# EAGLE board NeoDigito Medio v2_0 (EAGLE 9.1.3)
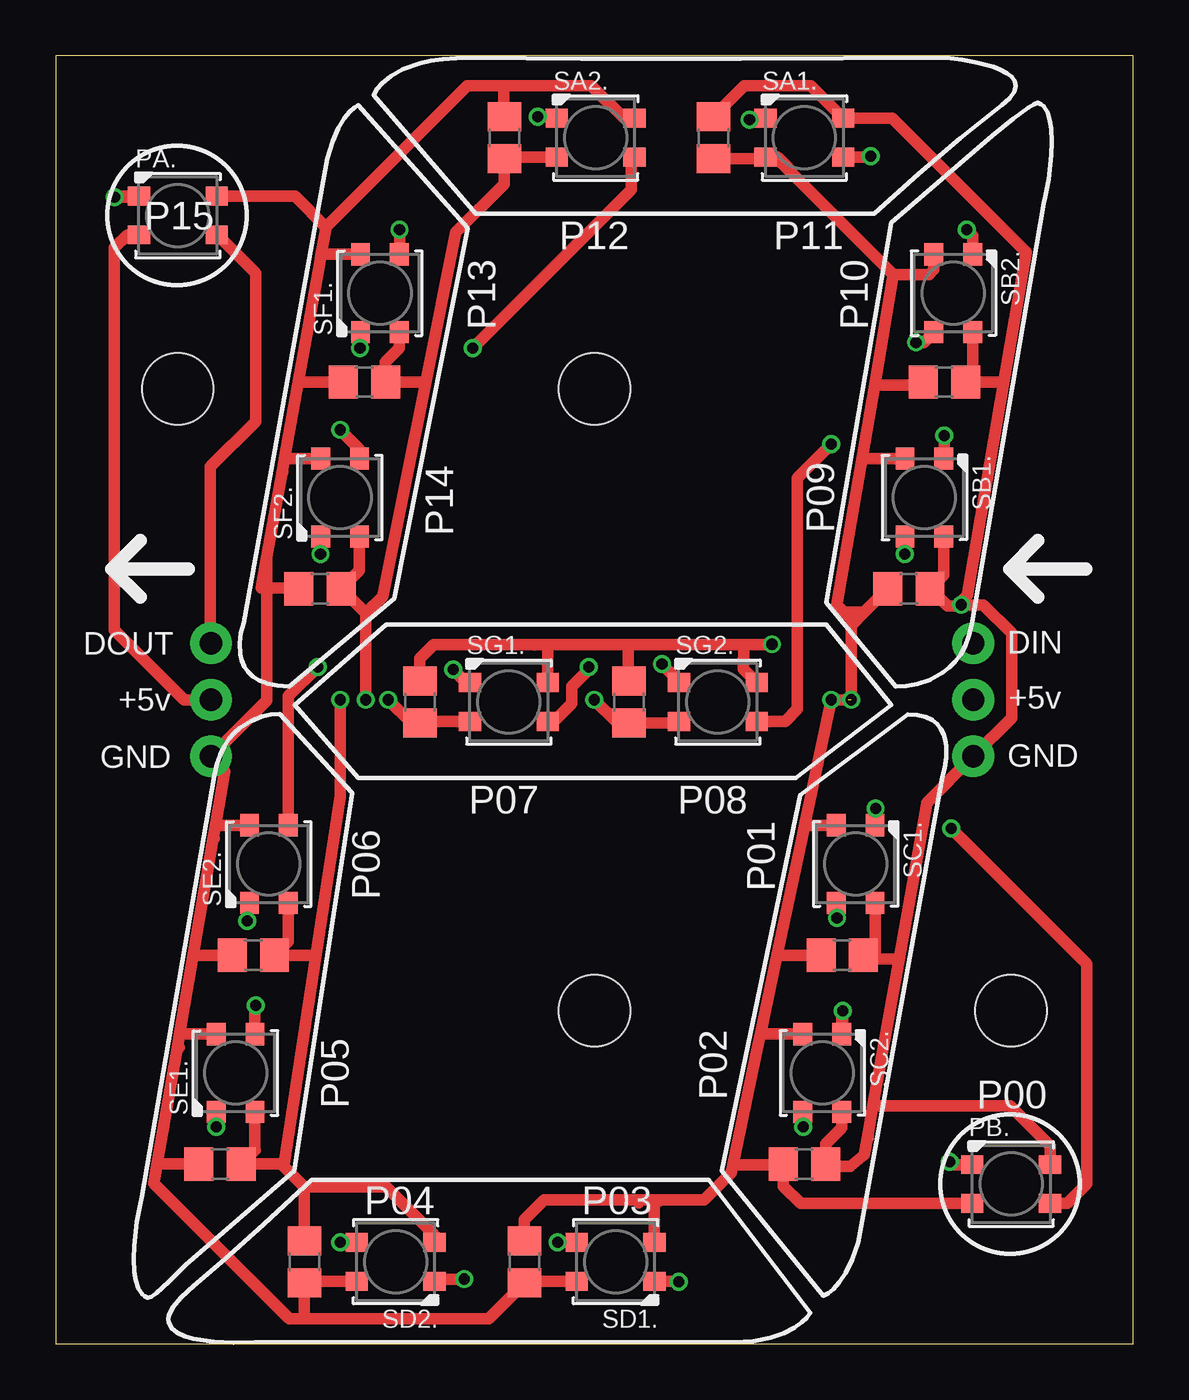
[diagram p0: board, top side]
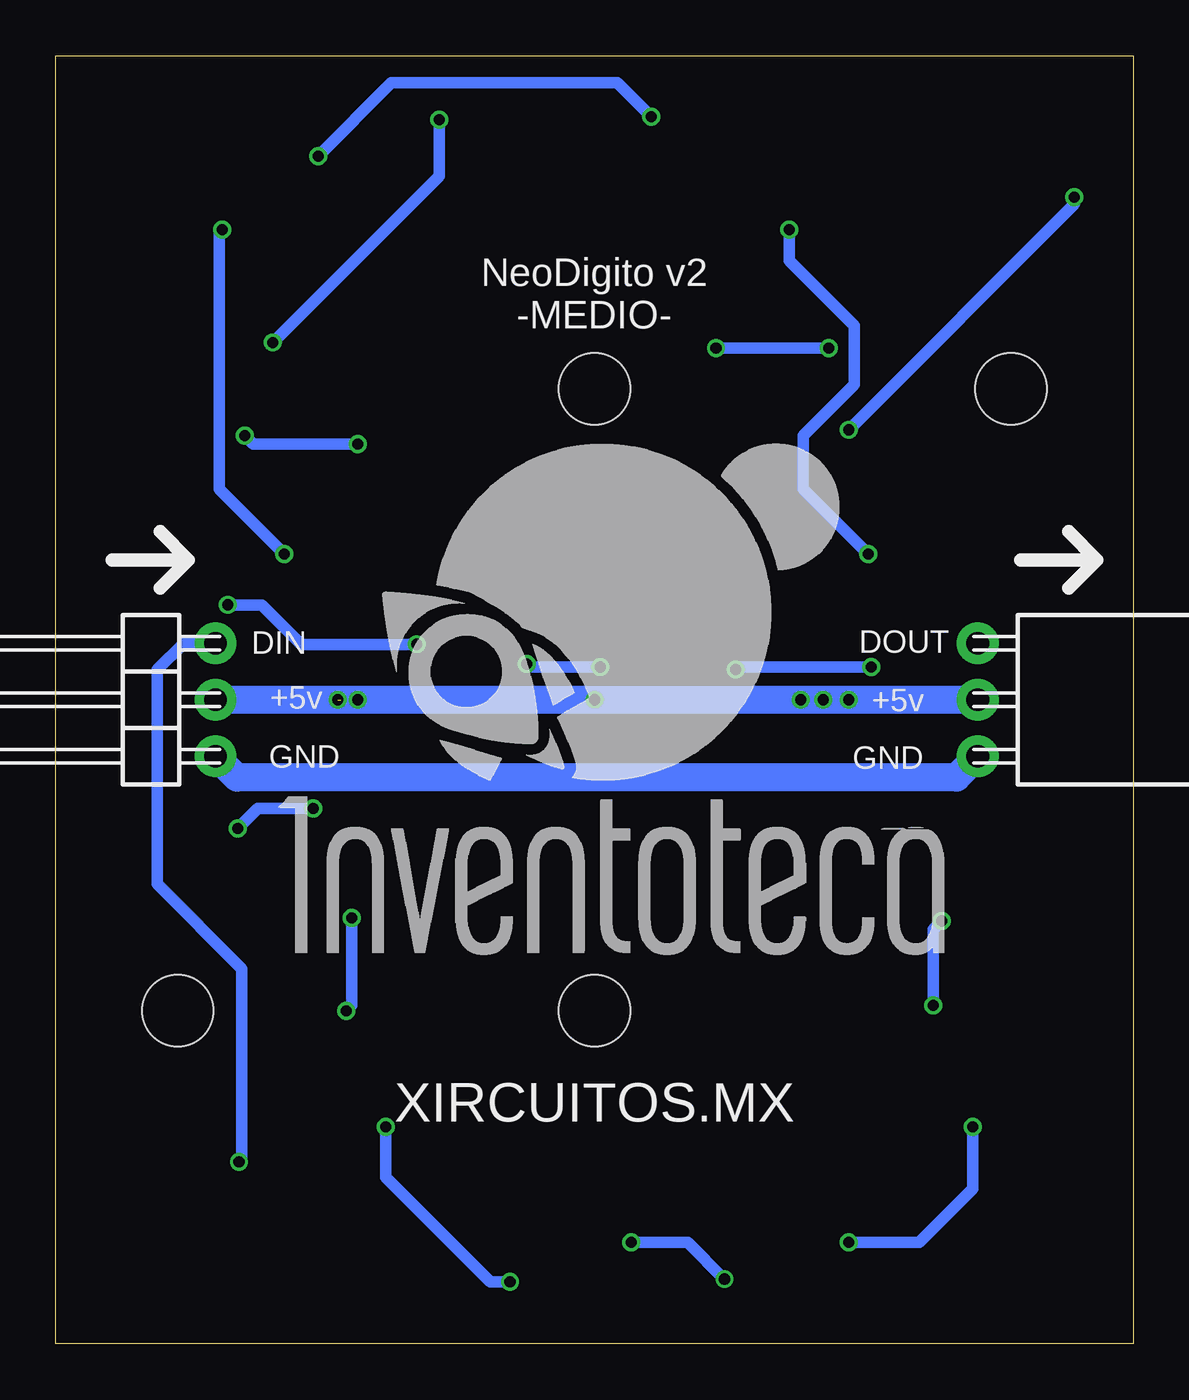
[diagram p1: board, bottom side, seen from below]

Size 48.5 x 58 mm. Coordinates in mm from the lower left corner, seen from the top.
Outline: 0,0 48.5,0 48.5,58 0,58 0,0
Copper layers (1*16): Top 0.035mm / dielectric 1.5mm / Bottom 0.035mm
Design rules "_xircuitos.mx_2L_DRC": minimum track width 6mil, minimum drill 12mil, track to track 6mil, track to pad 6mil, pad to pad 6mil, via to via 6mil, smd to smd 0mil, copper to edge 10mil, drill to drill 12mil, minimum pad ring 10mil, minimum via ring 6mil, stop-mask expansion 2mil, vias tented up to drill 100mil, thermal gap 10mil
Holes 3.2 mm at 24.25,15 24.25,43 5.5,43 43,15

## Footprints (pad centres in the part's own frame; a part is rotated, then mirrored left to right if it is on the bottom)
C0805 = smd 1.3 x 1.5: 1 -0.95,0; 2 0.95,0
1X03 = drill 1 pad 1.88: 1 -2.54,0; 2 0,0; 3 2.54,0
1X03_NO_SILK = drill 1.016 pad 1.88: 1 -2.54,0; 2 0,0; 3 2.54,0
LED3535 = smd 1 x 0.85: 1 -1.75,0.875; 2 -1.75,-0.875; 3 1.75,-0.875; 4 1.75,0.875

## Placement (x,y rotation side)
C1  [C0805]  11.9,34 0 top
C2  [C0805]  13.9,43.3 0 top
C3  [C0805]  20.2,54.3 270 top
C4  [C0805]  29.6,54.3 270 top
C5  [C0805]  40,43.3 180 top
C6  [C0805]  38.4,34 180 top
C7  [C0805]  35.4,17.5 180 top
C8  [C0805]  33.7,8.1 180 top
C9  [C0805]  21.1,3.7 90 top
C10  [C0805]  11.2,3.7 90 top
C11  [C0805]  7.4,8.1 0 top
C12  [C0805]  8.9,17.5 0 top
C13  [C0805]  16.4,28.9 270 top
C14  [C0805]  25.8,28.9 270 top
DIN  455-1750-1-ND  [1X03]  41.3,29 270 bottom
DOUT  455-1750-1-ND  [1X03_NO_SILK]  7,29 270 bottom
PA.  WS2812B3535  [LED3535]  5.5,50.8 0 top
PB.  WS2812B3535  [LED3535]  43,7.2 0 top
SA1.  WS2812B3535  [LED3535]  33.7,54.3 0 top
SA2.  WS2812B3535  [LED3535]  24.3,54.3 0 top
SB1.  WS2812B3535  [LED3535]  39.1,38.1 270 top
SB2.  WS2812B3535  [LED3535]  40.4,47.3 270 top
SC1.  WS2812B3535  [LED3535]  36,21.6 270 top
SC2.  WS2812B3535  [LED3535]  34.5,12.2 270 top
SD1.  WS2812B3535  [LED3535]  25.2,3.7 180 top
SD2.  WS2812B3535  [LED3535]  15.3,3.7 180 top
SE1.  WS2812B3535  [LED3535]  8.1,12.2 90 top
SE2.  WS2812B3535  [LED3535]  9.6,21.6 90 top
SF1.  WS2812B3535  [LED3535]  14.6,47.3 90 top
SF2.  WS2812B3535  [LED3535]  12.8,38.1 90 top
SG1.  WS2812B3535  [LED3535]  20.4,28.9 0 top
SG2.  WS2812B3535  [LED3535]  29.8,28.9 0 top

## Library data of the parts
C1-C14 = CCV1; SPICEPREFIX: C
DIN = CCV1; PROD_ID: XXX-00000
DOUT = CCV1
PA. PB. SA1. SA2. SB1. SB2. SC1. SC2. SD1. SD2. SE1. SE2. SF1. SF2. SG1. SG2. = adafruit

## Nets
+5V: C1.2 C2.2 C3.2 C4.2 C5.2 C6.2 C7.2 C8.2 C9.2 C10.2 C11.2 C12.2 C13.2 C14.2 DIN.2 DOUT.2 PA..2 PB..2 SA1..2 SA2..2 SB1..2 SB2..2 SC1..2 SC2..2 SD1..2 SD2..2 SE1..2 SE2..2 SF1..2 SF2..2 SG1..2 SG2..2
GND: C1.1 C2.1 C3.1 C4.1 C5.1 C6.1 C7.1 C8.1 C9.1 C10.1 C11.1 C12.1 C13.1 C14.1 DIN.3 DOUT.3 PA..4 PB..4 SA1..4 SA2..4 SB1..4 SB2..4 SC1..4 SC2..4 SD1..4 SD2..4 SE1..4 SE2..4 SF1..4 SF2..4 SG1..4 SG2..4
N1: DIN.1 PB..1
N2: PB..3 SC1..1
N3: SC2..3 SD1..1
N4: SD2..3 SE1..1
N5: SE2..3 SG1..1
N6: SB1..1 SG2..3
N7: SA1..1 SB2..3
N8: SA2..3 SF1..1
N9: PA..1 SF2..3
N10: DOUT.1 PA..3
N$1: SE1..3 SE2..1
N$2: SC1..3 SC2..1
N$3: SA1..3 SA2..1
N$4: SF1..3 SF2..1
N$5: SD1..3 SD2..1
N$14: SG1..3 SG2..1
N$17: SB1..3 SB2..1

## Tracks (layer width: path | path; a pad name or v marks a point on that pad's centre or on a via)
+5V  (via drill 0.5)  (1 unrouted)
  Top 0.508: 30.52,8.25 30.4,7.7 29.2,6.5 27.2,6.5 | 30.52,8.25 31.58,13.3 31.73,14.01 | 31.73,14.01 32.48,17.57 | 32.48,17.57 33.55,22.59 33.71,23.38 | 33.71,23.38 v34.9,29 v35.8,29 35.8,32 | C7.2 32.55,17.5 32.48,17.57 | 30.52,8.25 30.52,8.1 30.48,8.06 32.71,8.06 C8.2 32.75,7.1 33.52,6.33 34.55,6.33 PB..2 | C9.2 21.1,5.6 22,6.5 26.4,6.5 | 27.2,6.5 26.4,6.5 | 26.25,6.35 26.4,6.5 | 11.73,17.57 12.81,24.64 12.81,24.68 v12.81,29 | 11.73,17.57 10.27,8 | 10.27,8 11.2,7.07 | 11.2,7.07 C10.2 | 11.2,7.07 14.88,7.07 17.05,4.91 SD2..2 | 10.27,8 10.17,8.1 C11.2 8.97,8.72 SE1..2 | 11.73,17.57 11.66,17.5 C12.2 10.47,18.12 SE2..2 | v14.97,29 16.02,27.95 C13.2 16.48,28.02 SG1..2 | v24.24,29 25.29,27.95 C14.2 27.8,27.95 27.88,28.02 SG2..2 | v13.95,29 13.95,32.89 | 13.95,32.89 14.72,33.66 16.68,43.4 | 16.68,43.4 18.02,50.04 20.2,52.22 C3.2 | 20.27,53.42 C3.2 | C4.2 32.58,53.35 32.5,53.42 | 35.8,32 35.8,32.64 35.42,33.02 | 35.42,33.02 35.16,33.27 36.14,38.99 36.3,39.9 | 36.3,39.9 36.85,43.17 | 36.85,43.17 37.7,48.13 | 37.7,48.13 32.97,52.87 | 32.97,52.87 32.65,53.19 | 37.7,48.13 39.31,48.13 39.52,48.35 SB2..2 | C5.2 38.92,43.17 36.85,43.17 | C6.2 36.39,32.94 | 36.39,32.94 35.8,32.35 35.8,32 | 35.42,33.02 35.5,32.94 36.39,32.94 | 16.68,43.4 16.58,43.3 C2.2 14.84,44.2 15.47,44.83 SF1..2 | 13.95,32.89 13.95,32.9 C1.2 13.68,34.83 SF2..2 | DOUT.2 5.78,29 2.65,32.13 2.65,47.7 2.65,49.34 3.24,49.92 PA..2 | SC1..2 33.74,23.35 33.71,23.38 | SC2..2 31.8,13.95 31.73,14.01 | SD1..2 26.95,6.25 27.2,6.5 | SB1..2 36.35,39.85 36.3,39.9 | SA2..2 20.27,53.42 | 20.27,53.42 C3.2 | SA1..2 32.5,53.42 | 32.97,52.87 32.97,52.96 32.5,53.42
  Bottom 0.508: 14.08,29 v13.95,29
  Bottom 1.27: DOUT.2 v12.81,29 v13.95,29 v14.97,29 v24.24,29 34.1,29 | 34.1,29 v34.9,29 | 34.1,29 DIN.2 | 14.08,29 | 35.67,29
GND  (via drill 0.5)
  Top 0.508: 36.88,18.02 C7.1 36.51,17.34 37,17.34 | 37.96,17.34 39.2,24.3 39.2,24.36 DIN.3 43.02,28.18 43.02,32 41.75,33.27 v40.75,33.27 40.62,33.27 40.56,33.21 | 37.96,17.34 36.78,10.72 | 36.57,9.51 36.39,8.52 35.77,8 34.75,8 C8.1 34.65,9 35.38,9.72 SC2..4 | 36.78,10.72 42.95,10.72 44.75,8.92 PB..4 | 36.57,9.26 36.57,9.51 | 37,17.34 37.96,17.34 | 21.18,2.83 C9.1 | 7.2,23.42 7.6,25.78 DOUT.3 9.51,28.97 9.51,35.45 | 7.2,23.42 7.09,22.8 | 7.09,22.8 6.19,17.53 | 6.19,17.53 5.59,14.02 | 5.59,14.02 5.49,13.43 | 5.49,13.43 4.58,8.14 | 4.58,8.14 4.43,7.24 10.53,1.14 11.03,1.14 | 21.18,2.83 19.49,1.14 11.03,1.14 | 11.03,1.14 11.2,1.31 C10.1 11.28,2.83 SD2..4 | C11.1 4.63,8.1 4.58,8.14 | 5.57,13.35 5.49,13.43 | C12.1 6.22,17.5 6.19,17.53 | 7.14,22.75 7.09,22.8 | 21.57,31.5 17.03,31.5 17.02,31.48 16.4,30.87 C13.1 | 21.57,31.5 22.2,31.5 | 22.2,31.5 25.77,31.5 | 25.77,31.5 30.34,31.5 30.84,31.5 | C14.1 25.77,29.89 25.77,31.5 | 21.55,31.47 21.57,31.5 | 40.56,33.21 41.03,33.68 42.67,43.3 | 42.67,43.3 43.67,49.15 37.65,55.17 SA1..4 33.98,56.64 30.99,56.64 C4.1 | 9.51,35.45 10.2,39.28 | 10.2,39.28 10.29,39.82 | 10.29,39.82 10.94,43.43 | 10.94,43.43 11.86,48.52 11.94,48.96 | 11.94,48.96 12.18,50.29 13.32,51.44 | 13.32,51.44 18.53,56.64 20.18,56.64 | 20.18,56.64 24.11,56.64 25.58,55.17 SA2..4 | C3.1 20.18,55.27 20.18,56.64 | C1.1 10.91,34.04 9.26,34.04 9.51,35.45 | C2.1 11.07,43.3 10.94,43.43 | 10.23,39.25 10.2,39.28 | 40.56,33.21 40.14,33.21 C6.1 39.98,34.62 SB1..4 | 41.27,43.62 C5.1 | C5.1 42.67,43.3 | 30.84,31.5 v32.24,31.5 | 30.84,31.5 30.97,31.37 30.97,30.86 30.95,30.84 30.95,30.38 SG2..4 | SC1..4 36.88,17.47 37,17.34 | SD1..4 21.18,2.83
  Top 0.508: SE2..4 7.27,23.35 7.2,23.42 | SE1..4 5.66,13.95 5.59,14.02 | SG1..4 22.15,31.45 22.2,31.5 | SB2..4 41.27,43.62 | 41.27,43.62 C5.1 | SF1..4 12.03,49.05 11.94,48.96 | SF2..4 10.32,39.85 10.29,39.82 | PA..4 10.78,51.67 12.17,50.28 13.32,51.44 | 36.78,10.72 36.57,9.51
  Bottom 0.508: v32.24,31.5 37.45,31.5 39.23,33.27 v40.75,33.27
  Bottom 1.27: DOUT.3 7.96,25.5 40.34,25.5 DIN.3
N1  (via drill 0.5)
  Top 0.508: v40.24,8.19 40.36,8.07 PB..1
  Bottom 0.508: DIN.1 42.74,31.54 43.93,30.35 43.93,20.7 40.12,16.89 40.12,8.32 v40.24,8.19
N2  (via drill 0.5)
  Top 0.508: v40.3,23.2 46.4,17.1 46.4,7.2 45.52,6.33 PB..3 | 36.9,23.12 v36.9,24.1 36.9,23.38 SC1..1
  Bottom 0.508: v40.3,23.2 39.4,24.1 v36.9,24.1
N3  (via drill 0.5)
  Top 0.508: v33.64,9.78 33.62,9.79 SC2..3 | 28.02,2.83 v28.05,2.79 28.02,2.83 | SD1..1 28.02,2.83
  Bottom 0.508: v33.64,9.78 33.64,7.49 28.94,2.79 v28.05,2.79
N4  (via drill 0.5)
  Top 0.508: v12.81,4.58 v12.81,4.57 v12.81,4.58 | v7.22,9.78 SE1..1 | v12.81,4.58 SD2..3
  Bottom 0.508: v12.81,4.57 9.64,4.57 7.22,6.99 v7.22,9.78
N5  (via drill 0.5)
  Top 0.508: v11.79,30.48 10.47,29.16 10.47,23.8 SE2..3 | v17.89,30.35 18.47,29.77 SG1..1
  Bottom 0.508: v11.79,30.48 17.76,30.48 v17.89,30.35
N6  (via drill 0.5)
  Top 0.508: v34.91,40.51 33.38,38.99 33.38,28.57 32.84,28.02 31.9,28.02 SG2..3 | 39.98,40.88 v39.99,40.89 39.99,39.86 SB1..1
  Bottom 0.508: v34.91,40.51 39.61,40.51 v39.99,40.89
N7  (via drill 0.5)
  Top 0.508: v38.72,45.09 38.91,45.09 39.06,45.09 SB2..3 | v31.23,55.12 32.14,55.12 32.09,55.17 SA1..1
  Bottom 0.508: v38.72,45.09 31.23,52.58 v31.23,55.12
N8  (via drill 0.5)
  Top 0.508: v18.78,44.83 25.9,51.95 25.9,53.3 26.02,53.42 SA2..3 | v13.7,44.83 13.72,44.86 SF1..1
  Bottom 0.508: v18.78,44.83 v13.7,44.83
N9  (via drill 0.5)
  Top 0.508: v12.81,41.15 13.68,40.28 SF2..3 | 3.4,51.63 v2.65,51.63 2.7,51.67 PA..1 3.7,51.63
  Bottom 0.508: v12.81,41.15 2.65,51.31 v2.65,51.63
N10
  Top 0.508: DOUT.1 6.97,31.57 6.97,39.5 9,41.53 9,48.21 7.27,49.95 PA..3
N$1  (via drill 0.5)
  Top 0.508: v9,15.24 8.97,15.21 SE1..3 | 8.72,19.16 v8.62,19.05 8.62,19.75 SE2..1
  Bottom 0.508: v9,15.24 9,18.67 v8.62,19.05
N$2  (via drill 0.5)
  Top 0.508: 35.42,13.74 v35.42,14.99 35.38,14.94 SC2..1 | 35.16,19.96 35.16,19.6 | 35.16,19.6 v35.16,19.18 | SC1..3 35.12,19.64 35.16,19.6
  Bottom 0.508: v35.16,19.18 35.16,15.24 v35.42,14.99
N$3  (via drill 0.5)
  Top 0.508: v36.69,53.47 36.65,53.42 SA1..3 | 21.77,55.17 v21.7,55.24 22.48,55.24 SA2..1
  Bottom 0.508: v36.69,53.47 33.38,56.77 23.23,56.77 v21.7,55.24
N$4  (via drill 0.5)
  Top 0.508: v11.93,35.56 v11.92,35.56 v11.93,35.56 | SF1..3 v15.48,50.16 | SF2..1 v11.93,35.56
  Bottom 0.508: v15.48,50.16 15.48,48.77 12.56,45.85 12.56,43.18 14.84,40.89 14.84,38.48 v11.92,35.56
N$5  (via drill 0.5)
  Top 0.508: 23.6,4.57 v22.59,4.57 v22.59,4.58 SD1..3 | v18.4,2.92 16.9,2.92 16.99,2.83 SD2..1
  Bottom 0.508: v18.4,2.92 20.05,4.57 v22.59,4.57
N$14  (via drill 0.5)
  Top 0.508: v23.99,30.48 23.99,30.35 23.23,29.59 23.23,28.83 22.42,28.02 SG1..3 | v27.29,30.61 28.12,29.77 SG2..1
  Bottom 0.508: v23.99,30.48 27.16,30.48 v27.29,30.61
N$17  (via drill 0.5)
  Top 0.508: 38.23,35.57 v38.21,35.56 38.21,36.34 SB1..3 | v41.01,50.16 41.27,49.9 SB2..1
  Bottom 0.508: v38.21,35.56 41.13,38.48 41.13,50.04 v41.01,50.16

## Text on the board
tPlace: P15 | P12 | P11 | P13 | P10 | P14 | P09 | DOUT | DIN | +5v | +5v | GND | GND | P07 | P08 | P06 | P01 | P02 | P05 | P00 | P04 | P03
bPlace: NeoDigito v2 / -MEDIO- | +5v | +5v | GND | GND | XIRCUITOS.MX